# EAGLE board Reciever_11-16 (EAGLE 8.4.0)
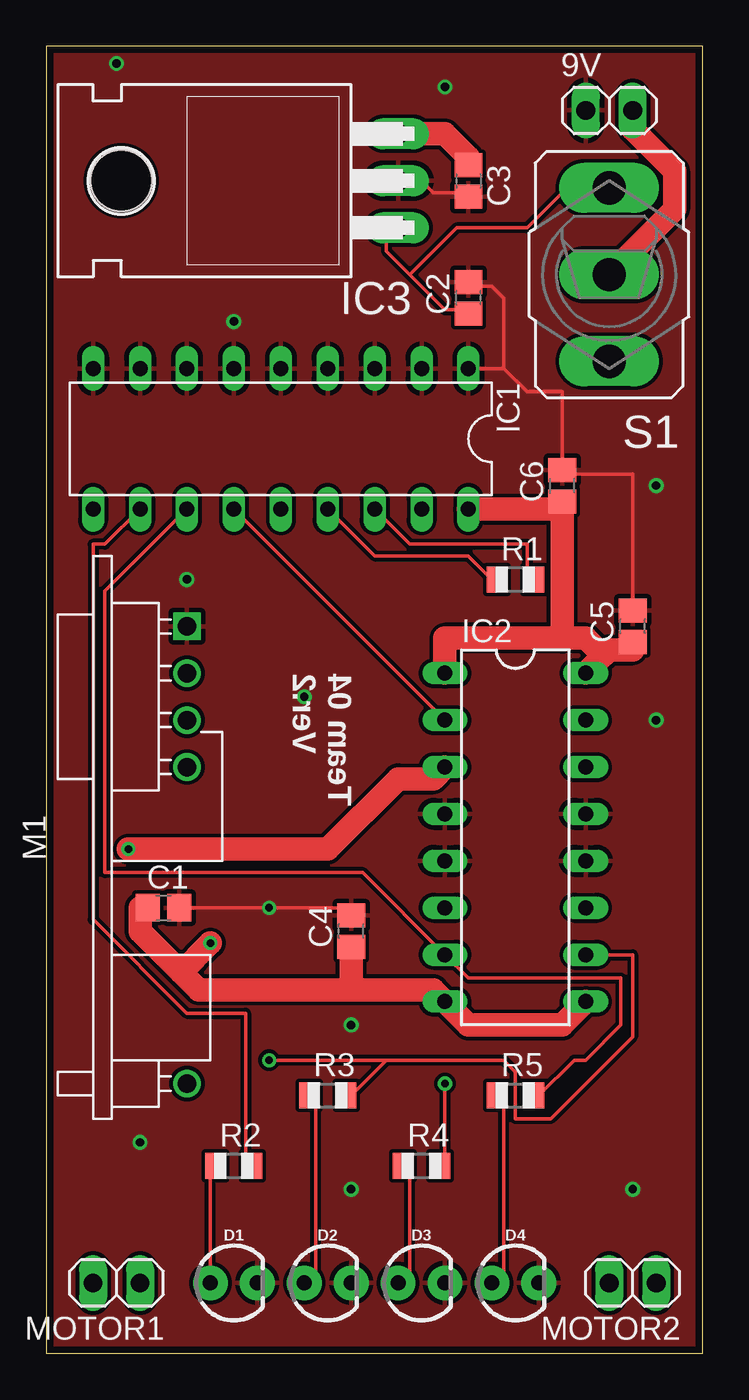
[diagram p0: board, top side]
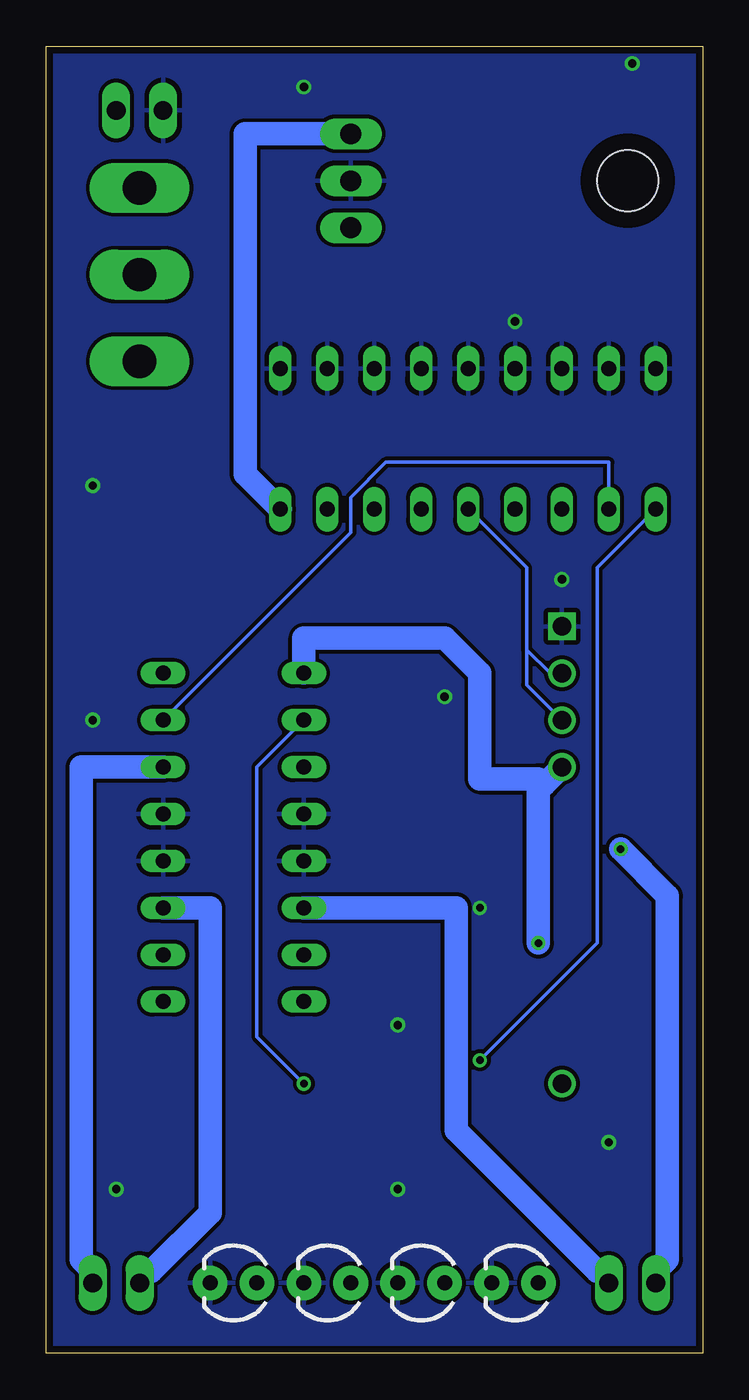
[diagram p1: board, bottom side, seen from below]

Size 35.54 x 70.79 mm. Coordinates in mm from the lower left corner, seen from the top.
Outline: 0,0 35.54,0 35.54,70.79 0,70.79 0,0
Copper layers (1*16): Top 0.0356mm / dielectric 1.5011mm / Bottom 0.0356mm
Design rules "LaenPCBOrder": minimum track width 6mil, minimum drill 13mil, track to track 6mil, track to pad 6mil, pad to pad 6mil, via to via 6mil, smd to smd 6mil, copper to edge 15mil, drill to drill 6mil, minimum pad ring 7mil, minimum via ring 7mil, stop-mask expansion 3mil, vias tented up to drill 0mil, thermal gap 10mil
Net classes: 0 default: width 0.178 mm, drill 0.406 mm, clearance 0.203 mm; 1 +5V: width 1.27 mm, drill 0.406 mm, clearance 0.203 mm to class 0, clearance 0.203 mm; 2 Motor: width 1.27 mm, drill 0.406 mm, clearance 0.203 mm to class 0, clearance 0.203 mm to class 1, clearance 0.203 mm

## Footprints (pad centres in the part's own frame; a part is rotated, then mirrored left to right if it is on the bottom)
1X02 = drill 1.016 long: 1 -1.27,0; 2 1.27,0
C0805 = smd 1.3 x 1.5: 1 -0.85,0; 2 0.85,0
LED_3MM = drill 0.813 pad 1.88: A -1.27,0; K 1.27,0
18-DIP-A = drill 0.813 long: 1 -10.16,-3.81; 2 -7.62,-3.81; 3 -5.08,-3.81; 4 -2.54,-3.81; 5 0,-3.81; 6 2.54,-3.81; 7 5.08,-3.81; 8 7.62,-3.81; 9 10.16,-3.81; 10 10.16,3.81; 11 7.62,3.81; 12 5.08,3.81; 13 2.54,3.81; 14 0,3.81; 15 -2.54,3.81; 16 -5.08,3.81; 17 -7.62,3.81; 18 -10.16,3.81
DIL16 = drill 0.813 long: 1 -8.89,-3.81; 2 -6.35,-3.81; 3 -3.81,-3.81; 4 -1.27,-3.81; 5 1.27,-3.81; 6 3.81,-3.81; 7 6.35,-3.81; 8 8.89,-3.81; 9 8.89,3.81; 10 6.35,3.81; 11 3.81,3.81; 12 1.27,3.81; 13 -1.27,3.81; 14 -3.81,3.81; 15 -6.35,3.81; 16 -8.89,3.81
TO220H = drill 1.118 long: 1 -2.54,-10.16; 2 0,-10.16; 3 2.54,-10.16 | hole 3.302: 0,4.826
WIRELESS-XY-MK-5V#V = drill 1 square: 1 11.43,0 | drill 1: 2 8.89,0; 3 6.35,0; 4 3.81,0; ANT -13.335,0
R0805 = smd 1.1 x 1.4: 1 -1,0; 2 1,0
M9040P = drill 1.803 long: 1 0,4.699; 2 0,0; 3 0,-4.699

## Placement (x,y rotation side)
9V  [1X02]  30.48,67.31 0 top
C1  0.1u  [C0805]  6.35,24.13 0 top
C2  10u  [C0805]  22.86,57.15 90 top
C3  10u  [C0805]  22.86,63.5 270 top
C4  0.1u  [C0805]  16.51,22.86 90 top
C5  0.1u  [C0805]  31.75,39.37 90 top
C6  0.1u  [C0805]  27.94,46.99 90 top
D1  [LED_3MM]  10.16,3.81 0 top
D2  [LED_3MM]  15.24,3.81 0 top
D3  [LED_3MM]  20.32,3.81 0 top
D4  [LED_3MM]  25.4,3.81 0 top
IC1  HT12D"  [18-DIP-A]  12.7,49.53 180 top
IC2  L293D  [DIL16]  25.4,27.94 270 top
IC3  7805T  [TO220H]  8.89,63.5 90 top
M1  WIRELESS-XY-MK-5V-V  [WIRELESS-XY-MK-5V#V]  7.62,27.94 90 top
MOTOR1  [1X02]  3.81,3.81 180 top
MOTOR2  [1X02]  31.75,3.81 180 top
R1  47k  [R0805]  25.4,41.91 0 top
R2  220  [R0805]  10.16,10.16 0 top
R3  220  [R0805]  15.24,13.97 0 top
R4  220  [R0805]  20.32,10.16 0 top
R5  220  [R0805]  25.4,13.97 0 top
S1  [M9040P]  30.48,58.42 180 top

## Library data of the parts
9V MOTOR1 MOTOR2 = pinhead
C1-C6 IC3 R1-R5 = adafruit
D1-D4 = SparkFun-LED; PROD_ID: DIO-08794
IC1 = holtek
IC2 = st-microelectronics; MPN: L293D; OC_FARNELL: 9589619; OC_NEWARK: 56P8249
M1 = diy-modules
S1 = switch

## Nets
+5V [+5V]: C1.1 C3.1 C4.1 C5.1 C6.1 IC1.18 IC2.1 IC2.8 IC2.9 IC2.16 IC3.3 M1.4
+LEFT [Motor]: IC2.3 MOTOR1.2
+RIGHT [Motor]: IC2.14 MOTOR2.1
-LEFT [Motor]: IC2.6 MOTOR1.1
-RIGHT [Motor]: IC2.11 MOTOR2.2
DIN: IC1.14 M1.2 M1.3
GND: 9V.1 C1.2 C2.2 C3.2 C4.2 C5.2 C6.2 D1.K D2.K D3.K D4.K IC1.1 IC1.2 IC1.3 IC1.4 IC1.5 IC1.6 IC1.7 IC1.8 IC1.9 IC2.4 IC2.5 IC2.12 IC2.13 IC3.2 M1.1
N$1: IC1.16 R1.2
N$3: IC1.10 IC2.10 R3.2
N$4: IC1.15 R1.1
N$5: D1.A R2.1
N$6: IC1.11 IC2.15 R2.2
N$7: IC1.12 IC2.7 R5.2
N$8: IC1.13 IC2.2 R4.2
N$10: 9V.2 S1.2
N$13: D2.A R3.1
N$14: D3.A R4.1
N$16: D4.A R5.1
N$17: C2.1 IC3.1 S1.3

## Tracks (layer width: path | path; a pad name or v marks a point on that pad's centre or on a via)
+5V  (via drill 0.41)
  Top 1.27: 16.51,19.68 C4.1 | 16.51,19.68 20.95,19.68 IC2.8 22.86,17.78 27.94,17.78 IC2.9 | 7.3,20.64 8.26,19.68 16.51,19.68 | 7.3,20.64 5.08,22.86 5.08,24.13 C1.1 | 7.3,20.64 v8.89,22.23 | IC3.3 21.59,66.04 22.86,64.77 C3.1 | IC1.18 27.94,45.72 | IC2.16 30.16,37.78 | 30.16,37.78 30.48,38.1 31.75,38.1 C5.1 | IC2.1 21.59,38.73 27.94,38.73 | 27.94,38.73 29.21,38.73 30.16,37.78 | 27.94,38.73 27.94,45.72 | 27.94,45.72 C6.1
  Bottom 1.27: 8.57,30.8 8.89,30.48 v8.89,22.23 | 8.57,30.8 M1.4 | IC3.3 24.77,66.04 24.77,47.62 IC1.18 | IC2.1 21.59,38.73 13.97,38.73 12.06,36.83 12.06,31.11 8.89,31.11 8.57,30.8
+LEFT  (via drill 0.41)
  Top 1.27: IC2.3 20.95,31.11 19.05,31.11 15.24,27.3 v4.45,27.3
  Bottom 1.27: v4.45,27.3 1.91,24.77 1.91,5.08 2.54,4.45 MOTOR1.2
+RIGHT
  Bottom 1.27: IC2.14 33.66,31.75 33.66,5.08 33.02,4.45 MOTOR2.1
-LEFT
  Bottom 1.27: IC2.6 13.34,24.13 13.34,12.06 5.71,4.45 5.08,4.45 MOTOR1.1
-RIGHT
  Bottom 1.27: IC2.11 26.67,24.13 26.67,7.62 29.84,4.45 30.48,4.45 MOTOR2.2
DIN
  Bottom 0.178: IC1.14 9.53,42.55 9.53,38.1 | 9.53,38.1 8.26,36.83 M1.2 | M1.3 9.53,36.2 9.53,38.1
GND  (via drill 0.41, 0.45)
  Top 0.178: C1.2 v12.06,24.13 16.51,24.13 C4.2 | 24.77,53.34 24.77,57.15 24.13,57.78 22.86,57.78 C2.2 | IC1.1 24.77,53.34 | IC3.2 20.32,63.5 20.95,62.87 22.86,62.87 C3.2 | 24.77,53.34 26.04,52.07 27.94,52.07 C6.2 27.94,47.62 31.75,47.62 C5.2
  other vias: 10.16,55.88 33.02,46.99 21.59,68.58 33.02,34.29 13.97,35.56 5.08,11.43 31.75,8.89 16.51,17.78 16.51,8.89 7.62,41.91 3.81,69.85
  pour Bottom: 0,71.12 35.56,71.12 35.56,0 0,0
  pour Top: 0,71.12 35.56,71.12 35.56,0 0,0
N$1
  Top 0.178: IC1.16 19.68,43.81 26.04,43.81 26.04,41.91 R1.2
N$3  (via drill 0.41)
  Top 0.178: 18.41,15.88 16.51,13.97 R3.2 | 18.41,15.88 24.77,15.88 25.4,15.24 25.4,12.7 27.3,12.7 31.75,17.14 31.75,21.59 IC2.10 | 18.41,15.88 v12.06,15.88
  Bottom 0.178: IC1.10 5.71,42.55 5.71,22.23 v12.06,15.88
N$4
  Top 0.178: IC1.15 17.78,43.18 22.86,43.18 24.13,41.91 R1.1
N$5
  Top 0.178: D1.A 8.89,10.16 R2.1
N$6
  Top 0.178: IC1.11 3.17,43.81 2.54,43.81 2.54,23.5 7.62,18.41 10.79,18.41 10.79,10.16 R2.2
  Bottom 0.178: IC2.15 19.05,44.45 19.05,46.35 17.14,48.26 5.08,48.26 IC1.11
N$7
  Top 0.178: R5.2 26.67,13.97 28.57,15.88 29.21,15.88 31.11,17.78 31.11,20.32 22.86,20.32 IC2.7 17.14,26.04 3.17,26.04 3.17,41.27 IC1.12
N$8  (via drill 0.41)
  Top 0.178: v21.59,14.61 21.59,10.16 R4.2 | IC2.2 IC1.13
  Bottom 0.178: v21.59,14.61 24.13,17.14 24.13,31.75 IC2.2
N$10
  Top 1.27: 9V.2 31.75,66.3 34.02,64.03 34.02,61.96 S1.2
N$13
  Top 0.178: D2.A 14.61,3.81 14.61,13.97 R3.1
N$14
  Top 0.178: D3.A 19.68,3.81 19.68,10.16 R4.1
N$16
  Top 0.178: D4.A 24.77,3.81 24.77,13.97 R5.1
N$17
  Top 0.178: 19.68,58.42 18.41,59.69 18.41,60.96 IC3.1 | 19.68,58.42 21.59,56.52 22.86,56.52 C2.1 | 19.68,58.42 22.23,60.96 26.04,60.96 27.94,62.87 30.48,62.87 S1.3

## Text on the board
tPlace: Team 04 / Ver.2